# EAGLE board CT_schematic (EAGLE 7.6.0)

Size 100 x 80 mm. Coordinates in mm from the lower left corner, seen from the top.
Outline: 0,0 100,0 100,80 0,80 0,0
Copper layers (1*16): Top 0.035mm / dielectric 1.5mm / Bottom 0.035mm
Design rules "default": minimum track width 10mil, minimum drill 24mil, track to track 8mil, track to pad 8mil, pad to pad 8mil, via to via 8mil, smd to smd 8mil, copper to edge 40mil, drill to drill 8mil, minimum pad ring 10mil, minimum via ring 8mil, stop-mask expansion 4mil, vias tented up to drill 0mil, thermal gap 10mil

## Footprints (pad centres in the part's own frame; a part is rotated, then mirrored left to right if it is on the bottom)
C0603 = smd 0.8 x 0.8: 1 -0.762,0; 2 0.762,0
C0402 = smd 0.5 x 0.5: 1 -0.508,0; 2 0.508,0
C0805 = smd 1.2 x 1.3: 1 -1.016,0; 2 1.016,0
C1210 = smd 1.2 x 2.5: 1 -1.524,0; 2 1.524,0
EXV-9H = smd 3.505 x 1.676: 1 -2.857,0; 2 2.857,0
L0603 = smd 0.8 x 0.8: 1 -0.762,0; 2 0.762,0
PJ-037B_PACKAGE = drill 3.7 square: 1 12,0 | drill 3.2 square: 2 6,0
R0603 = smd 0.8 x 0.8: 1 -0.762,0; 2 0.762,0
LFBGA100 = smd 0.52 x 0.52: A1 -3.6,3.6; A2 -2.8,3.6; A3 -2,3.6; A4 -1.2,3.6; A5 -0.4,3.6; A6 0.4,3.6; A7 1.2,3.6; A8 2,3.6; A9 2.8,3.6; A10 3.6,3.6; B1 -3.6,2.8; B2 -2.8,2.8; B3 -2,2.8; B4 -1.2,2.8; B5 -0.4,2.8; B6 0.4,2.8; B7 1.2,2.8; B8 2,2.8; B9 2.8,2.8; B10 3.6,2.8; C1 -3.6,2; C2 -2.8,2; C3 -2,2; C4 -1.2,2; C5 -0.4,2; C6 0.4,2; C7 1.2,2; C8 2,2; C9 2.8,2; C10 3.6,2; D1 -3.6,1.2; D2 -2.8,1.2; D3 -2,1.2; D4 -1.2,1.2; D5 -0.4,1.2; D6 0.4,1.2; D7 1.2,1.2; D8 2,1.2; D9 2.8,1.2; D10 3.6,1.2; E1 -3.6,0.4; E2 -2.8,0.4; E3 -2,0.4; E4 -1.2,0.4; E5 -0.4,0.4; E6 0.4,0.4; E7 1.2,0.4; E8 2,0.4; E9 2.8,0.4; E10 3.6,0.4; F1 -3.6,-0.4; F2 -2.8,-0.4; F3 -2,-0.4; F4 -1.2,-0.4; F5 -0.4,-0.4; F6 0.4,-0.4; F7 1.2,-0.4; F8 2,-0.4; F9 2.8,-0.4; F10 3.6,-0.4; G1 -3.6,-1.2; G2 -2.8,-1.2; G3 -2,-1.2; G4 -1.2,-1.2; G5 -0.4,-1.2; G6 0.4,-1.2; G7 1.2,-1.2; G8 2,-1.2; G9 2.8,-1.2; G10 3.6,-1.2; H1 -3.6,-2; H2 -2.8,-2; H3 -2,-2; H4 -1.2,-2; H5 -0.4,-2; H6 0.4,-2; H7 1.2,-2; H8 2,-2; H9 2.8,-2; H10 3.6,-2; J1 -3.6,-2.8; J2 -2.8,-2.8; J3 -2,-2.8; J4 -1.2,-2.8; J5 -0.4,-2.8; J6 0.4,-2.8; J7 1.2,-2.8; J8 2,-2.8; J9 2.8,-2.8; J10 3.6,-2.8; K1 -3.6,-3.6; K2 -2.8,-3.6; K3 -2,-3.6; K4 -1.2,-3.6; K5 -0.4,-3.6; K6 0.4,-3.6; K7 1.2,-3.6; K8 2,-3.6; K9 2.8,-3.6; K10 3.6,-3.6
SOIC-8 = smd 1.6 x 0.6: 1 -2.7,1.905 | smd 1.55 x 0.6: 2 -2.7,0.635; 3 -2.7,-0.635; 4 -2.7,-1.905; 5 2.7,-1.905; 6 2.7,-0.635; 7 2.7,0.635; 8 2.7,1.905
SSOP-28 = smd 1.5 x 0.4: 1 -3.625,4.225; 2 -3.625,3.575; 3 -3.625,2.925; 4 -3.625,2.275; 5 -3.625,1.625; 6 -3.625,0.975; 7 -3.625,0.325; 8 -3.625,-0.325; 9 -3.625,-0.975; 10 -3.625,-1.625; 11 -3.625,-2.275; 12 -3.625,-2.925; 13 -3.625,-3.575; 14 -3.625,-4.225; 15 3.625,-4.225; 16 3.625,-3.575; 17 3.625,-2.925; 18 3.625,-2.275; 19 3.625,-1.625; 20 3.625,-0.975; 21 3.625,-0.325; 22 3.625,0.325; 23 3.625,0.975; 24 3.625,1.625; 25 3.625,2.275; 26 3.625,2.925; 27 3.625,3.575; 28 3.625,4.225
FCI_10118193-0001LF = smd 0.4 x 1.35: 1 -1.3,2.675; 2 -0.65,2.675; 3 0,2.675; 4 0.65,2.675; 5 1.3,2.675 | smd 1.6 x 1.4: 6 -3.2,2.45; 7 3.2,2.45 | smd 1.9 x 1.9: 8 -1.2,0; 9 1.2,0 | hole 0.5: -3.3,0; 3.3,0
TST-110-05-T-D-RA = drill 1 pad 1.7 square: 1 0,0 | drill 1 pad 1.7: 2 0,2.54; 3 2.54,0; 4 2.54,2.54; 5 5.08,0; 6 5.08,2.54; 7 7.62,0; 8 7.62,2.54; 9 10.16,0; 10 10.16,2.54; 11 12.7,0; 12 12.7,2.54; 13 15.24,0; 14 15.24,2.54; 15 17.78,0; 16 17.78,2.54; 17 20.32,0; 18 20.32,2.54; 19 22.86,0; 20 22.86,2.54
SOT-23-8 = smd 0.4 x 1.2: 1 -0.975,-1.3; 2 -0.325,-1.3; 3 0.325,-1.3; 4 0.975,-1.3; 5 0.975,1.3; 6 0.325,1.3; 7 -0.325,1.3; 8 -0.975,1.3
182-009-MALE = drill 1.194 pad 1.524 octagon: 1 -5.537,10.923; 2 -2.769,10.923; 3 0,10.923; 4 2.769,10.923; 5 5.537,10.923; 6 -4.153,8.08; 7 -1.384,8.08; 8 1.384,8.08; 9 4.153,8.08 | hole 3.048: -12.446,9.501; 12.446,9.501
USB-A-H = drill 0.914: 1 2.718,3.493; 2 2.718,1.003; 3 2.718,-1.003; 4 2.718,-3.493 | drill 2.311: 5 0,-6.566; 6 0,6.566
SOT143B = smd 1 x 0.7: 1 -0.75,-1 | smd 0.6 x 0.7: 2 0.95,-1; 3 0.95,1; 4 -0.95,1
ABS07-32.768KHZ-7-T = smd 1.1 x 2.4: 1 -2.5,0; 2 0,0
ABLS-25.000MHZ-B2F-T = smd 5.6 x 2.8: 1 -3.81,0; 2 5.69,0
ASFL1 = smd 1.7 x 1.5: 1 -1.27,-1.1; 2 1.27,-1.1; 3 1.27,1.1; 4 -1.27,1.1
WSON-8 = smd 0.3 x 0.6: 1 -0.75,0; 2 0.05,0; 3 0.85,0; 4 1.65,0; 5 1.65,3.8; 6 0.85,3.8; 7 0.05,3.8; 8 -0.75,3.8 | smd 3 x 2.6: PAD 0.45,1.9
SON-6 = smd 0.55 x 0.3: 1 -0.355,0.5 | smd 0.52 x 0.3: 2 -0.37,0; 3 -0.37,-0.5; 4 0.37,-0.5; 5 0.37,0; 6 0.37,0.5
SW_4-1437565-2 = smd 1.4 x 2.1: 1 -2.23,4.55; 2 -2.23,-4.55; 3 2.23,4.55; 4 2.23,-4.55
LGM67K-G1J2-24-Z = smd 0.8 x 1.4: A -2,0; C 0,0
NC7SZ125M5X = smd 1.3 x 0.7: 1 -1.3,0.95; 2 -1.3,0; 3 -1.3,-0.95; 4 1.3,-0.95; 5 1.3,0.95

## Placement (x,y rotation side)
C1  1e-06  [C0603]  -58.42,72.39 0 top  (outside the outline)
C2  1e-07  [C0603]  -62.23,72.39 0 top  (outside the outline)
C3  1e-07  [C0603]  -66.04,72.39 0 top  (outside the outline)
C4  1e-07  [C0603]  -69.85,72.39 0 top  (outside the outline)
C5  1e-07  [C0603]  -73.66,72.39 0 top  (outside the outline)
C6  1e-07  [C0603]  -77.47,72.39 0 top  (outside the outline)
C7  1e-07  [C0603]  -15.24,77.47 0 top  (outside the outline)
C8  4.7e-06  [C0603]  -54.61,72.39 0 top  (outside the outline)
C9  1e-08  [C0603]  -19.05,77.47 0 top  (outside the outline)
C10  1e-06  [C0603]  -22.86,77.47 0 top  (outside the outline)
C11  1e-11  [C0402]  -57.15,77.47 0 top  (outside the outline)
C12  1e-11  [C0402]  -60.96,77.47 0 top  (outside the outline)
C13  1e-11  [C0402]  -64.77,77.47 0 top  (outside the outline)
C14  1e-11  [C0402]  -68.58,77.47 0 top  (outside the outline)
C15  1e-08  [C0402]  -72.39,77.47 0 top  (outside the outline)
C16  1e-07  [C0402]  -76.2,77.47 0 top  (outside the outline)
C17  4.7e-06  [C0805]  -33.02,66.04 0 top  (outside the outline)
C18  1e-07  [C0402]  -80.01,77.47 0 top  (outside the outline)
C19  1e-07  [C0402]  -15.24,82.55 0 top  (outside the outline)
C20  1e-07  [C0402]  -19.05,82.55 0 top  (outside the outline)
C21  1e-07  [C0402]  -22.86,82.55 0 top  (outside the outline)
C22  1e-07  [C0402]  -26.67,82.55 0 top  (outside the outline)
C23  1e-08  [C0402]  -30.48,82.55 0 top  (outside the outline)
C24  1e-08  [C0402]  -34.29,82.55 0 top  (outside the outline)
C25  1e-05  [C1210]  -69.85,59.69 0 top  (outside the outline)
C26  1e-05  [C1210]  -76.2,59.69 0 top  (outside the outline)
C27  1e-07  [C0402]  -38.1,82.55 0 top  (outside the outline)
C28  0.0001  [EXV-9H]  -54.61,52.07 0 top  (outside the outline)
C29  0.0001  [EXV-9H]  -66.04,52.07 0 top  (outside the outline)
C30  1e-08  [C0402]  -41.91,82.55 0 top  (outside the outline)
C31  1e-08  [C0402]  -45.72,82.55 0 top  (outside the outline)
F1  240.0  [L0603]  -26.67,77.47 0 top  (outside the outline)
J1  PJ-037B  [PJ-037B_PACKAGE]  -55.88,29.21 0 top  (outside the outline)
R2  1000.0  [R0603]  -30.48,77.47 0 top  (outside the outline)
R4  4700.0  [R0603]  -34.29,77.47 0 top  (outside the outline)
R5  10000.0  [R0603]  -53.34,66.04 0 top  (outside the outline)
R6  10000.0  [R0603]  -58.42,66.04 0 top  (outside the outline)
R7  10000.0  [R0603]  -63.5,66.04 0 top  (outside the outline)
R8  10000.0  [R0603]  -68.58,66.04 0 top  (outside the outline)
R9  4700.0  [R0603]  -38.1,77.47 0 top  (outside the outline)
R10  10000.0  [R0603]  -73.66,66.04 0 top  (outside the outline)
R11  10000.0  [R0603]  -78.74,66.04 0 top  (outside the outline)
R12  10000.0  [R0603]  -15.24,72.39 0 top  (outside the outline)
R13  10000.0  [R0603]  -20.32,72.39 0 top  (outside the outline)
R14  10000.0  [R0603]  -25.4,72.39 0 top  (outside the outline)
R15  10000.0  [R0603]  -30.48,72.39 0 top  (outside the outline)
R16  10000.0  [R0603]  -35.56,72.39 0 top  (outside the outline)
R17  10000.0  [R0603]  -40.64,72.39 0 top  (outside the outline)
R18  120.0  [R0603]  -41.91,77.47 0 top  (outside the outline)
R19  100000.0  [R0603]  -38.1,66.04 0 top  (outside the outline)
R20  2231.0  [R0603]  -45.72,77.47 0 top  (outside the outline)
R21  1000.0  [R0603]  -49.53,77.47 0 top  (outside the outline)
R22  10000.0  [R0603]  -45.72,72.39 0 top  (outside the outline)
R23  10000.0  [R0603]  -50.8,72.39 0 top  (outside the outline)
R24  9100.0  [R0603]  -53.34,77.47 0 top  (outside the outline)
R25  680000.0  [R0603]  -43.18,66.04 0 top  (outside the outline)
R26  120000.0  [R0603]  -48.26,66.04 0 top  (outside the outline)
U1  stm32f105vbh6  [LFBGA100]  -35.56,29.21 0 top  (outside the outline)
U2  AT25080B-SSHL-T  [SOIC-8]  -24.13,43.18 0 top  (outside the outline)
U3  FT232RL-REEL  [SSOP-28]  -20.32,30.48 0 top  (outside the outline)
U4  10118193-0001LF  [FCI_10118193-0001LF]  -71.12,41.91 0 top  (outside the outline)
U5  TST-110-05-T-D-RA  [TST-110-05-T-D-RA]  -46.99,49.53 0 top  (outside the outline)
U6  MAX3051EKA+T  [SOT-23-8]  -15.24,66.04 0 top  (outside the outline)
U7  182-009-113R531  [182-009-MALE]  -36.83,6.35 0 top  (outside the outline)
U8  61400416021  [USB-A-H]  -59.69,8.89 0 top  (outside the outline)
U9  prtr5v0u2ax  [SOT143B]  -58.42,82.55 0 top  (outside the outline)
U10  ABS07-32.768KHZ-7-T  [ABS07-32.768KHZ-7-T]  -49.53,59.69 0 top  (outside the outline)
U11  ABLS-25.000MHZ-B2F-T  [ABLS-25.000MHZ-B2F-T]  -26.67,59.69 0 top  (outside the outline)
U12  ASFL1-12MHZ-NCS  [ASFL1]  -62.23,43.18 0 top  (outside the outline)
U13  LP3878SDX-ADJ/NOPB  [WSON-8]  -45.72,40.64 0 top  (outside the outline)
U14  TPS3895ADRYR  [SON-6]  -62.23,81.28 0 top  (outside the outline)
U15  4-1437565-2  [SW_4-1437565-2]  -72.39,27.94 0 top  (outside the outline)
U16  Q65110A2395  [LGM67K-G1J2-24-Z]  -58.42,59.69 0 top  (outside the outline)
U17  nc7sz125m5x  [NC7SZ125M5X]  -20.32,66.04 0 top  (outside the outline)
U18  nc7sz125m5x  [NC7SZ125M5X]  -26.67,66.04 0 top  (outside the outline)

## Library data of the parts
C1-C31 F1 J1 R2 R4-R26 U1-U18 = circuit_tree

## Nets
CLK_CRYSTAL_U1_A1: C11.1 U1.A1 U10.1
CLK_CRYSTAL_U1_B1: C12.1 U1.B1 U10.2
CLK_CRYSTAL_U1_C1: C13.1 U1.C1 U11.1
CLK_CRYSTAL_U1_D1: C14.1 U1.D1 U11.2
CLK_U3_27: U3.27 U12.3
GND: C1.2 C2.2 C3.2 C4.2 C5.2 C6.2 C7.2 C8.2 C9.2 C10.2 C11.2 C12.2 C13.2 C14.2 C15.2 C16.2 C17.2 C18.2 C19.2 C20.2 C21.2 C22.2 C23.2 C24.2 C25.2 C26.2 C27.2 C28.2 C29.2 C30.2 C31.2 J1.2 R2.2 R5.2 R11.2 R17.2 R21.2 R24.2 R26.2 U1.C2 U1.E4 U1.E5 U1.E6 U1.E7 U1.G1 U1.H1 U2.4 U3.7 U3.18 U3.21 U3.25 U3.26 U4.5 U4.6 U4.7 U4.8 U4.9 U5.4 U5.6 U5.8 U5.10 U5.12 U5.14 U5.16 U5.18 U5.20 U6.2 U6.8 U7.5 U8.4 U8.5 U8.6 U9.1 U12.2 U13.3 U13.PAD U14.2 U16.C U17.2 U17.3 U18.1 U18.3
NET_U1_D5: R5.1 U1.D5
NET_U1_E1: R4.1 U1.E1 U18.4
NET_U1_K1: C9.1 C10.1 F1.1 U1.J1 U1.K1
NET_U1_K9: U16.A
NET_U1_K10: U15.3 U15.4
NET_U2_3: R6.1 U2.3
NET_U2_7: R8.1 U2.7
NET_U3_14: R10.1 U3.14
NET_U3_17: C18.1 U3.17
NET_U3_19: R11.1 U3.19
NET_U4_1: R9.1 U4.1
NET_U4_2: U3.16 U4.2
NET_U4_3: U3.15 U4.3
NET_U4_19: R9.2
NET_U5_3: R12.1 U5.3
NET_U5_7: R14.1 U5.7
NET_U5_9: R15.1 U5.9
NET_U5_19: R17.1 U5.19
NET_U6_6: R18.2 U6.6
NET_U7_2: R18.2 U6.6 U7.2
NET_U7_3: R18.1 U6.7 U7.3
NET_U13_1: C24.1 U13.1
NET_U13_6: R20.2 R21.1 U13.6
NET_U13_8: R19.1 U13.8
NET_U14_1: R23.1 R24.1 U14.1
NET_U14_3: R25.2 R26.1 U14.3
NET_U14_4: R22.1 U14.4 U17.4 U18.2
NET_U15_1: R2.1 U15.1 U15.2
PROC_CAN1_RX: U1.B4 U6.4
PROC_CAN1_TX: U1.A4 U6.1
PROC_SPI1_MISO: U1.A6 U2.2
PROC_SPI1_MOSI: U1.C5 U2.5
PROC_SPI1_NSS: R7.1 U1.G3 U2.1
PROC_SPI1_SCK: U1.H3 U2.6
PROC_SYS_JTDI: R13.1 U1.A8 U5.5
PROC_SYS_JTDO: U1.A7 U5.13
PROC_UART4_RX: U1.B8 U3.1
PROC_UART4_TX: U1.B9 U3.5
PROC_USB_OTG_FS_DM: U1.C10 U8.2 U9.3
PROC_USB_OTG_FS_DP: U1.B10 U8.3 U9.2
PROC_USB_OTG_FS_VBUS: U1.C9 U8.1 U9.4
RST_OUT_U5_SRESET_B: R16.1 U5.15 U17.1
VCC_S1_15V2: C25.1 C28.1 C29.1 J1.1 R19.2 U13.4
VCC_TIER1_3V3: C1.1 C2.1 C3.1 C4.1 C5.1 C6.1 C7.1 C8.1 C15.1 C16.1 C17.1 C19.1 C20.1 C21.1 C22.1 C23.1 C26.1 C27.1 C30.1 C31.1 F1.2 R4.2 R6.2 R7.2 R8.2 R10.2 R12.2 R13.2 R14.2 R15.2 R16.2 R20.1 R22.2 R23.2 R25.1 U1.B2 U1.D2 U1.F4 U1.F5 U1.F6 U1.F7 U2.8 U3.4 U3.20 U5.1 U5.2 U6.3 U12.4 U13.5 U14.6 U17.5 U18.5

## Tracks (layer width: path | path; a pad name or v marks a point on that pad's centre or on a via)
CLK_CRYSTAL_U1_A1  (2 unrouted)
CLK_CRYSTAL_U1_B1  (2 unrouted)
CLK_CRYSTAL_U1_C1  (2 unrouted)
CLK_CRYSTAL_U1_D1  (2 unrouted)
CLK_U3_27  (1 unrouted)
GND  (81 unrouted)
NET_U1_D5  (1 unrouted)
NET_U1_E1  (2 unrouted)
NET_U1_K1  (4 unrouted)
NET_U1_K10  (1 unrouted)
NET_U2_3  (1 unrouted)
NET_U2_7  (1 unrouted)
NET_U3_14  (1 unrouted)
NET_U3_17  (1 unrouted)
NET_U3_19  (1 unrouted)
NET_U4_1  (1 unrouted)
NET_U4_2  (1 unrouted)
NET_U4_3  (1 unrouted)
NET_U5_3  (1 unrouted)
NET_U5_7  (1 unrouted)
NET_U5_9  (1 unrouted)
NET_U5_19  (1 unrouted)
NET_U6_6  (1 unrouted)
NET_U7_2  (2 unrouted)
NET_U7_3  (2 unrouted)
NET_U13_1  (1 unrouted)
NET_U13_6  (2 unrouted)
NET_U13_8  (1 unrouted)
NET_U14_1  (2 unrouted)
NET_U14_3  (2 unrouted)
NET_U14_4  (3 unrouted)
NET_U15_1  (2 unrouted)
PROC_CAN1_RX  (1 unrouted)
PROC_CAN1_TX  (1 unrouted)
PROC_SPI1_MISO  (1 unrouted)
PROC_SPI1_MOSI  (1 unrouted)
PROC_SPI1_NSS  (2 unrouted)
PROC_SPI1_SCK  (1 unrouted)
PROC_SYS_JTDI  (2 unrouted)
PROC_SYS_JTDO  (1 unrouted)
PROC_UART4_RX  (1 unrouted)
PROC_UART4_TX  (1 unrouted)
PROC_USB_OTG_FS_DM  (2 unrouted)
PROC_USB_OTG_FS_DP  (2 unrouted)
PROC_USB_OTG_FS_VBUS  (2 unrouted)
RST_OUT_U5_SRESET_B  (2 unrouted)
VCC_S1_15V2  (5 unrouted)
VCC_TIER1_3V3  (51 unrouted)